# Altium PCB rpm.PcbDoc
Units mm, origin at the board's own origin, x right, y up, seen from the top; angles counter-clockwise.
Board outline 100 x 100 mm, 2 copper layers (Top Layer, Bottom Layer); 69 components, 54 nets, 281 pads, 0 vias.
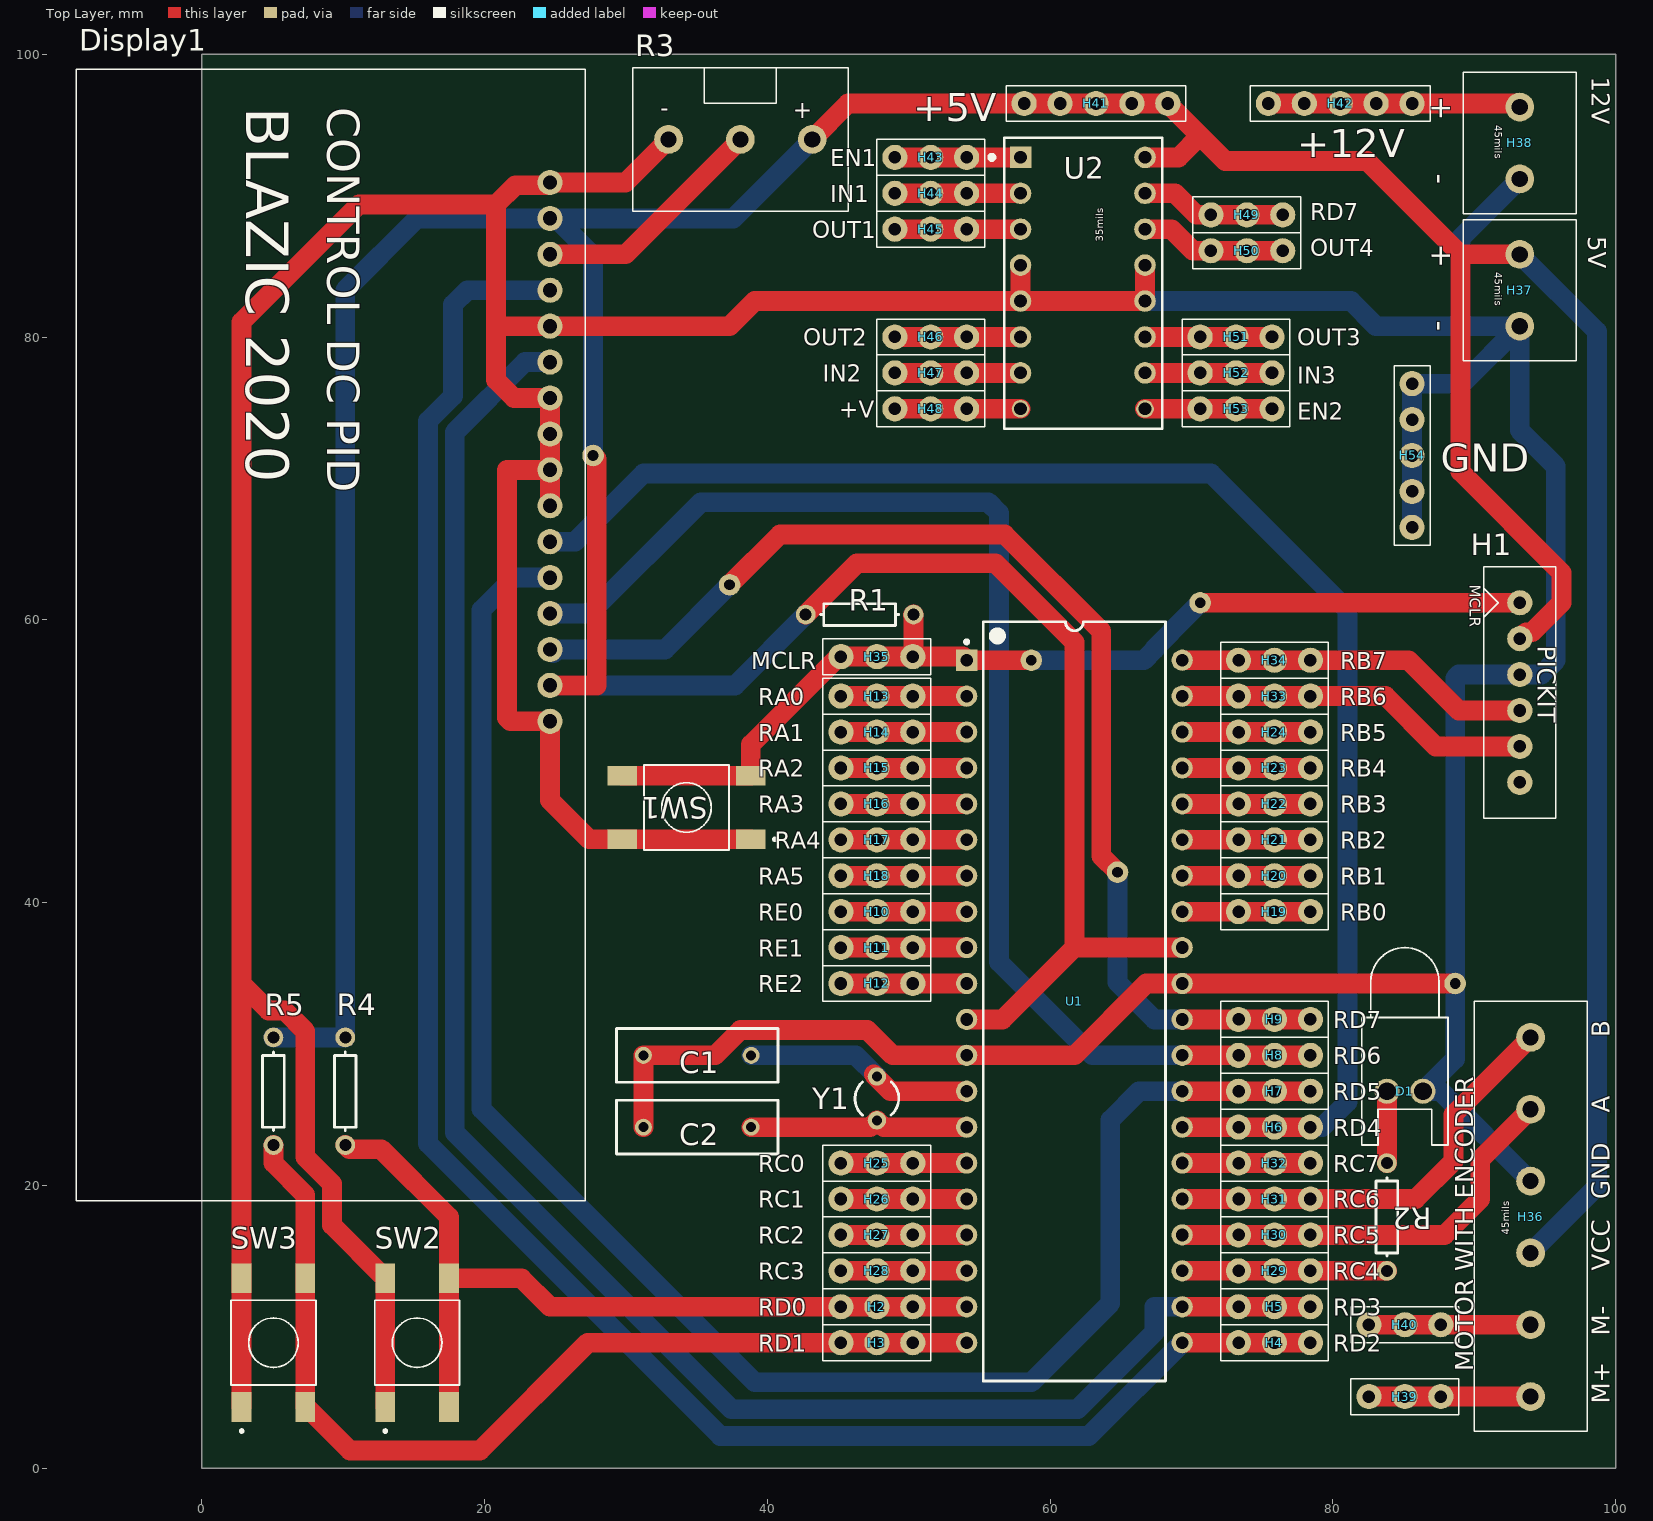
[diagram p0: Top Layer view]
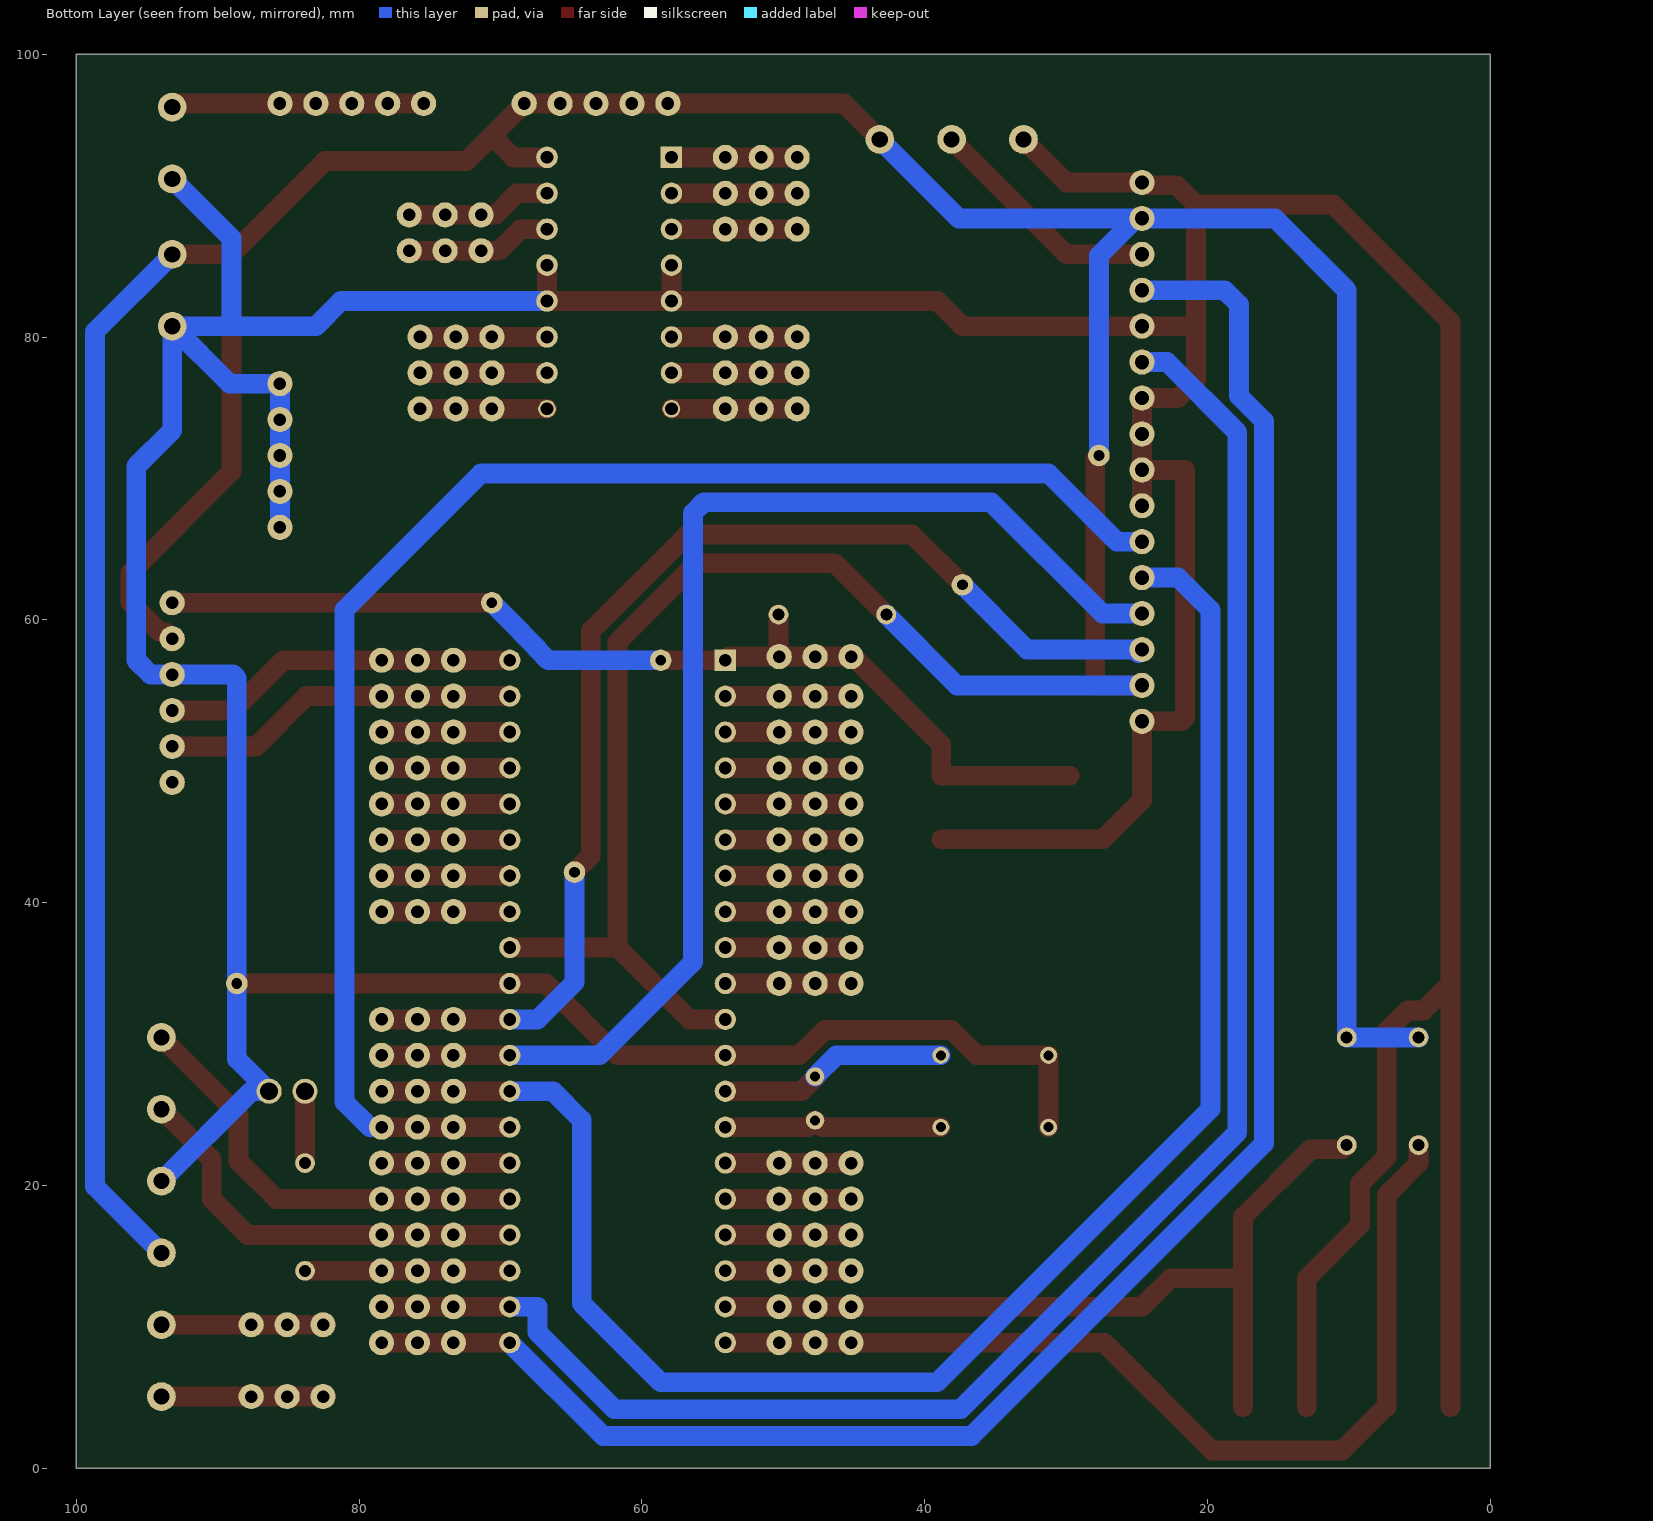
[diagram p1: Bottom Layer view, seen from below]

## Layer stack, top to bottom
Top Solder: solder mask 0.0102, Solder Resist, Dk 3.5
Top Layer: signal copper 0.0356
Dielectric 1: dielectric 0.32, FR-4, Dk 4.8
Bottom Layer: signal copper 0.0356
Bottom Solder: solder mask 0.0102, Solder Resist, Dk 3.5

## Board outline
0,0 100,0 100,100 0,100

## Design rules (kind name [scope] priority, off if disabled: settings)
Clearance [All] p1: gap=0.5 ignorepadtopadclearanceinfootprint=FALSE
PolygonConnect [All] p1: connectstyle=Relief reliefconductorwidth=0.254 reliefentries=4 polygonreliefangle="90 Angle" airgapwidth=0.254
RoutingVias [All] p1: holewidth=0.711 width=1.27 viastyle="Through Hole" minholewidth=0.711 minwidth=1.27 maxholewidth=0.711 maxwidth=1.27
SolderMaskExpansion [All] p1: expansion=0.102
Width [All] p1: maxlimit=1.6 minlimit=0.5 preferedwidth=1.4
30 further rules are at their usual default settings.

## Components (designator, comment, footprint, x,y, rotation, side; value= is the part's Value field where it differs from the comment)
C1 "Cap" RAD-0.3 35.052,29.21 r0 top value=22pF
C2 "Cap" RAD-0.3 35.052,24.13 r0 top value=22pF
D1 "LED0" LED-0 85.09,26.67 r180 top
Display1 "LCD 16 x 2" LCD16x2 27.138,98.932 r270 top
H1 "Programmer" Pickit 93.218,54.864 r270 top
H2 "Comment" "1X3 HEADER" 47.752,11.43 r180 top
H3 "Comment" "1X3 HEADER" 47.752,8.89 r180 top
H4 "Comment" "1X3 HEADER" 75.869,8.89 r180 top
H5 "Comment" "1X3 HEADER" 75.869,11.43 r180 top
H6 "Comment" "1X3 HEADER" 75.869,24.13 r180 top
H7 "Comment" "1X3 HEADER" 75.869,26.67 r180 top
H8 "Comment" "1X3 HEADER" 75.869,29.21 r180 top
H9 "Comment" "1X3 HEADER" 75.869,31.75 r180 top
H10 "Comment" "1X3 HEADER" 47.752,39.37 r180 top
H11 "Comment" "1X3 HEADER" 47.752,36.83 r180 top
H12 "Comment" "1X3 HEADER" 47.752,34.29 r180 top
H13 "Comment" "1X3 HEADER" 47.752,54.61 r180 top
H14 "Comment" "1X3 HEADER" 47.752,52.07 r180 top
H15 "Comment" "1X3 HEADER" 47.752,49.53 r180 top
H16 "Comment" "1X3 HEADER" 47.752,46.99 r180 top
H17 "Comment" "1X3 HEADER" 47.752,44.45 r180 top
H18 "Comment" "1X3 HEADER" 47.752,41.91 r180 top
H19 "Comment" "1X3 HEADER" 75.869,39.37 r180 top
H20 "Comment" "1X3 HEADER" 75.869,41.91 r180 top
H21 "Comment" "1X3 HEADER" 75.869,44.45 r180 top
H22 "Comment" "1X3 HEADER" 75.869,46.99 r180 top
H23 "Comment" "1X3 HEADER" 75.869,49.53 r180 top
H24 "Comment" "1X3 HEADER" 75.869,52.07 r180 top
H25 "Comment" "1X3 HEADER" 47.752,21.59 r180 top
H26 "Comment" "1X3 HEADER" 47.752,19.05 r180 top
H27 "Comment" "1X3 HEADER" 47.752,16.51 r180 top
H28 "Comment" "1X3 HEADER" 47.752,13.97 r180 top
H29 "Comment" "1X3 HEADER" 75.869,13.97 r180 top
H30 "Comment" "1X3 HEADER" 75.869,16.51 r180 top
H31 "Comment" "1X3 HEADER" 75.869,19.05 r180 top
H32 "Comment" "1X3 HEADER" 75.869,21.59 r180 top
H33 "Comment" "1X3 HEADER" 75.869,54.61 r180 top
H34 "Comment" "1X3 HEADER" 75.869,57.15 r180 top
H35 "Comment" "1X3 HEADER" 47.752,57.404 r0 top
H36 "Comment" "MOTOR ENCODER BLUE SCREW" 93.98,17.78 r90 top
H37 "5V" "1x2 Voltage blue screw" 93.218,83.312 r270 top
H38 "12V" "1x2 Voltage blue screw" 93.218,93.726 r270 top
H39 "Comment" "1X3 HEADER" 85.09,5.08 r180 top
H40 "Comment" "1X3 HEADER" 85.09,10.16 r180 top
H41 "Comment" "1X5 HEADER" 63.246,96.52 r180 top
H42 "Comment" "1X5 HEADER" 80.518,96.52 r180 top
H43 "Comment" "1X3 HEADER" 51.562,92.71 r0 top
H44 "Comment" "1X3 HEADER" 51.562,90.17 r180 top
H45 "Comment" "1X3 HEADER" 51.562,87.63 r180 top
H46 "Comment" "1X3 HEADER" 51.562,80.01 r180 top
H47 "Comment" "1X3 HEADER" 51.562,77.47 r180 top
H48 "Comment" "1X3 HEADER" 51.562,74.93 r180 top
H49 "Comment" "1X3 HEADER" 73.914,88.646 r180 top
H50 "Comment" "1X3 HEADER" 73.914,86.106 r180 top
H51 "Comment" "1X3 HEADER" 73.152,80.01 r180 top
H52 "Comment" "1X3 HEADER" 73.152,77.47 r180 top
H53 "Comment" "1X3 HEADER" 73.152,74.93 r180 top
H54 "Comment" "1X5 HEADER" 85.598,71.628 r90 top
R1 "Res1" AXIAL-0.3 46.53,60.378 r0 top value=10K
R2 "Res1" AXIAL-0.3 83.82,17.78 r90 top value=220
R3 "Potenciometar" ADJ_RES 38.1,93.98 r180 top
R4 "Res1" AXIAL-0.3 10.16,26.67 r270 top value=10K
R5 "Res1" AXIAL-0.3 5.08,26.67 r90 top value=10K
SW1 "Taster SMD" "Taster SMD" 34.29,46.736 r180 top
SW2 "Taster SMD" "Taster SMD" 15.24,8.89 r90 top
SW3 "Taster SMD" "Taster SMD" 5.08,8.89 r90 top
U1 "PIC16F877A-E/P" PDIP600-P40 61.722,33.02 r0 top
U2 "L293D" L293D 57.912,92.71 r0 top
Y1 "XTAL" R38 47.752,26.162 r0 top

## Footprints (in the part's own frame and the unit in brackets; to place one, negate y for a bottom-side part, rotate by r counter-clockwise, add the part's x,y. Pads: shape width x height; smd on the part's side, far side on the other; paste and mask are expansions set on the pad)
"1x2 Voltage blue screw" [mil] "Connector"
  round 80 hole 45: 1(-100,0) 2(100,0)
  silkscreen extent -197,-157 197,157, body extent -199,-178 201,176, height 599
"1X3 HEADER" [mil] "Distance 100mils"
  round 70 hole 35: 1(-100,0) 2(0,0) 3(100,0)
  silkscreen extent -150,-50 150,50
"1X5 HEADER" [mil] "Distance 100mils"
  round 70 hole 35: 1(-200,0) 2(-100,0) 3(0,0) 4(100,0) 5(200,0)
  silkscreen extent -250,-50 250,50
ADJ_RES [mil] "Promenljivi Otpornik"
  round 80 hole 45: 1(-200,0) 2(200,0) 3(0,0)
  silkscreen extent -300,-200 300,200
AXIAL-0.3 [mm] "Axial Device, Thru-Hole; 2 Leads; 0.3 in Pin Spacing"
  round 1.4 hole 0.85: 1(-3.81,0) 2(3.81,0)
  silkscreen extent -2.77,-0.76 2.77,0.76
L293D [mm]
  rect 1.524x1.524 hole 0.9: 1(0,0)
  round 1.524 hole 0.9: 2(0,-2.54) 3(0,-5.08) 4(0,-7.62) 5(0,-10.16) 6(0,-12.7) 7(0,-15.24) 10(8.8,-15.24) 11(8.8,-12.7) 12(8.8,-10.16) 13(8.8,-7.62) 14(8.8,-5.08) 15(8.8,-2.54) 16(8.8,0)
  round 1.25 hole 0.9: 8(0,-17.78) 9(8.8,-17.78)
  silkscreen extent -2.16,-19.18 10.03,1.4, body extent 0.25,-18.89 8.38,1.11, height 5.24
LCD16x2 [mil] "LCD16x2"
  round 70 hole 40: 1(314.96,-98.43) 2(414.96,-98.43) 3(514.96,-98.43) 4(614.96,-98.43) 5(714.96,-98.43) 6(814.96,-98.43) 7(914.96,-98.43) 8(1014.96,-98.43) 9(1114.96,-98.43) 10(1214.96,-98.43) 11(1314.96,-98.43) 12(1414.96,-98.43) 13(1514.96,-98.43) 14(1614.96,-98.43) 15(1714.96,-98.43) 16(1814.96,-98.43)
  silkscreen extent 0,-1417 3150,0
LED-0 [mil] "LED; 2 Leads"
  round 70 hole 50: 1(50,0) 2(-50,0)
  silkscreen extent -120,-400 120,150
"MOTOR ENCODER BLUE SCREW" [mil] "DC motor with encoder"
  round 80 hole 45: 1(-500,0) 2(-300,0) 3(-100,0) 4(100,0) 5(300,0) 6(500,0)
  silkscreen extent -597,-157 600,157
PDIP600-P40 [mm] "DIP, 40-Leads, Row Spacing 15.24mm, Pitch 2.54mm, Body 51.8x13.5mm"
  rect 1.5x1.5 hole 0.9: 1(-7.62,24.13)
  round 1.5 hole 0.9: 2(-7.62,21.59) 3(-7.62,19.05) 4(-7.62,16.51) 5(-7.62,13.97) 6(-7.62,11.43) 7(-7.62,8.89) 8(-7.62,6.35) 9(-7.62,3.81) 10(-7.62,1.27) 11(-7.62,-1.27) 12(-7.62,-3.81) 13(-7.62,-6.35) 14(-7.62,-8.89) 15(-7.62,-11.43) 16(-7.62,-13.97) 17(-7.62,-16.51) 18(-7.62,-19.05) 19(-7.62,-21.59) 20(-7.62,-24.13) 21(7.62,-24.13) 22(7.62,-21.59) 23(7.62,-19.05) 24(7.62,-16.51) 25(7.62,-13.97) 26(7.62,-11.43) 27(7.62,-8.89) 28(7.62,-6.35) 29(7.62,-3.81) 30(7.62,-1.27) 31(7.62,1.27) 32(7.62,3.81) 33(7.62,6.35) 34(7.62,8.89) 35(7.62,11.43) 36(7.62,13.97) 37(7.62,16.51) 38(7.62,19.05) 39(7.62,21.59) 40(7.62,24.13)
  silkscreen extent -7.74,-26.85 6.45,26.85, body extent -7.3,-26.85 7.3,26.85, height 6.35
Pickit [mil] "Programmer"
  round 70 hole 35: 1(-250,0) 2(-150,0) 3(-50,0) 4(50,0) 5(150,0) 6(250,0)
  silkscreen extent -350,-100 350,100
R38 [mm] "Crystal, Thru-Hole; 2 Leads; Body 3.1 x 8.2 mm (Dia.xH)"
  round 1.3 hole 0.7: 1(0,1.55) 2(0,-1.55)
  silkscreen extent -1.55,-1.19 1.55,1.17
RAD-0.3 [mm] "Radial Cap, Thru-Hole; 2 Leads; 0.3 in Pin Spacing"
  round 1.2 hole 0.7: 1(-3.81,0) 2(3.81,0)
  silkscreen extent -5.71,-1.91 5.71,1.91
"Taster SMD" [mm]
  rect 2.1x1.4 smd: 1(-4.55,2.25) 1(4.55,2.25) 2(-4.55,-2.25) 2(4.55,-2.25)
  silkscreen extent -6.35,-3 3,3, body extent -3.33,-2.67 3.07,2.63, height 1.5

## Part data
C1 C2: "Capacitor", LatestRevisionDate=17-Jul-2002, LatestRevisionNote="Re-released for DXP Platform.", PackageDescription="Radial Cap, Thru-Hole; 2 Leads; 0.3 in Pin Spacing", PackageReference=RAD-0.3, Published=8-Jun-2000, Publisher="Altium Limited"
D1: "Typical INFRARED GaAs LED", LatestRevisionDate=08-Jul-2005, LatestRevisionNote="Mech Layer 1 removed.", PackageDescription="LED; 2 Leads", PackageReference=LED-0, Published=8-Jun-2000, Publisher="Altium Limited"
Display1: library part "LCD 16 X 2"
H1: library part PICKIT
H2 H3 H4 H5 H6 H7 H8 H9 H10 H11 H12 H13 H14 H15 H16 H17 H18 H19 H20 H21 H22 H23 H24 H25 H26 H27 H28 H29 H30 H31 H32 H33 H34 H35 H39 H40 H43 H44 H45 H46 H47 H48 H49 H50 H51 H52 H53: library part "1X3 Header"
H36: library part "Motor encoder blue screw"
H37 H38: library part "1x2 Voltage blue screw"
H41 H42 H54: library part "1X5 Header"
R1 R2 R4 R5: "Resistor", LatestRevisionDate=17-Jul-2002, LatestRevisionNote="Re-released for DXP Platform.", PackageDescription="Axial Device, Thru-Hole; 2 Leads; 0.3 in Pin Spacing", PackageReference=AXIAL-0.3, Published=8-Jun-2000, Publisher="Altium Limited"
R3: library part ADJ_RES
SW1 SW2 SW3: Contact_Current_Rating="50 mA", Package=None, Availability=Unavailable, Configuration_Pole-Throw="Single Pole - Single Throw", MF="TE Connectivity", MP=2-1437565-8, Price=None, SnapEDA_Link=https://www.snapeda.com/parts/2-1437565-8/TE%20Connectivity%20ALCOSWITCH%20Switches/view-part/455292/?ref=snap, TE_purchase_URL=https://www.te.com/usa-en/product-2-1437565-8.html?te_bu=Cor&te_type=disp&te_campaign=seda_glo_cor-seda-global-disp-prtnr-fy19-seda-model-bom-cta_sma-317_1&elqCampaignId=32493
U1: "Enhanced FLASH Microcontroller, 8K (x14-Bit words) FLASH, 368 Bytes RAM, 40-Pin PDIP, Standard VDD Range, Extended Temperature", Supplier Part Number 1=PIC16F877A-E/P-ND, ComponentAvailability="Unknown. Contact manufacturer to determine status.", ComponentLink1Description=Datasheet, ComponentLink1URL=http://ww1.microchip.com/downloads/en/DeviceDoc/39582b.pdf, ComponentLink2Description="Packaging Specification", ComponentLink2URL=http://www.microchip.com/stellent/groups/techpub_sg/documents/packagingspec/en012702.pdf, ComponentLink3Description="Microchip.com Home", ComponentLink3URL=http://www.microchip.com/, DatasheetVersion="revB, Oct-2003", LatestRevisionDate=29-Jan-2009, LatestRevisionNote="Sch. layout revised. 3D Model Removed.", PackageDescription="40-Lead Plastic Dual In-Line (P) - 600 mil Body [PDIP]", PackageReference=PDIP600-P40, PackageVersion="revBB, Aug-2009", Published=11-Oct-2004, Publisher="Altium Limited", Supplier 1=Digi-Key, Supplier 2=Farnell, Supplier Part Number 2=1567990
U2: "Motor Driver"
Y1: "Crystal Oscillator", LatestRevisionDate=17-Jul-2002, LatestRevisionNote="Re-released for DXP Platform.", PackageDescription="Crystal, Thru-Hole; 2 Leads; Body 3.1 x 8.2 mm (Dia.xH)", PackageReference=R38, Published=8-Jun-2000, Publisher="Altium Limited"

## Free pads (board coordinates)
  round 1.524 hole 0.762: 3(37.338,62.484) 4(64.77,42.164) 5(58.674,57.15) 6(70.612,61.214) 7(88.646,34.29) 9(27.686,71.628)

## Nets (pads, with @x,y where several pads share a name; then routed paths per layer and width w, separated by ;. In a path a pad name is that pad's centre, name@x,y a point inside that pad or via, vN(x,y) a via of type N, cw(c..) or ccw(c..) an arc to the next point about the centre after c; other vN are vias at no path point)
5V: Display1.2 Display1.15 H1.2 H36.3 H37.1 H41.1 H41.2 H41.3 H41.4 H41.5 pad.9 R1.1 R3.1 R4.1 R5.2 U1.11 U1.32 U2.16 | length 381.2
  Top Layer w1.4: Display1.15 27.94,55.372 27.94,71.374 pad.9 ; R1.1 46.35,64.008 56.134,64.008 61.722,58.42 61.722,36.83 ; R3.1 45.72,96.52 H41.5 H41.4 H41.3 H41.2 H41.1 70.612,94.234 ; U1.11 56.642,31.75 61.722,36.83 ; U2.16 69.088,92.71 70.612,94.234 ; U1.32 61.722,36.83 ; H1.2 93.669,59.125 94.083,59.125 96.172,61.214 96.172,63.34 89.027,70.485 89.027,85.852 ; H37.1 89.027,85.852 ; 70.612,94.234 72.39,92.456 82.423,92.456 89.027,85.852
  Bottom Layer w1.4: R5.2 R4.1 10.16,83.312 15.24,88.392 Display1.2 Display1.2@25.052,88.392 ; Display1.15 37.714,55.372 R1.1 ; pad.9 27.686,85.758 Display1.2@25.052,88.392 ; R3.1 37.592,88.392 Display1.2@25.052,88.392 ; H37.1 98.679,80.391 98.679,59.182 98.679,19.939 H36.3
12V: H38.1 H42.1 H42.2 H42.3 H42.4 H42.5 | length 17.9
  Top Layer w1.4: H42.5 H42.4 H42.3 H42.2 H42.1 92.964,96.52 H38.1
+V: H48.1 H48.2 H48.3 U2.8 | length 8.9
  Top Layer w1.4: H48.3 H48.2 H48.1 U2.8
EN1: H43.1 H43.2 H43.3 U2.1 | length 8.9
  Top Layer w1.4: H43.1 H43.2 H43.3 U2.1
EN2: H53.1 H53.2 H53.3 U2.9 | length 9
  Top Layer w1.4: U2.9 H53.3 H53.2 H53.1
GND: C1.1 C2.1 D1.2 Display1.1 Display1.5 Display1.7 Display1.8 Display1.9 Display1.10 Display1.16 H1.3 H36.4 H37.2 H38.2 H54.1 H54.2 H54.3 H54.4 H54.5 pad.7 R3.2 SW1.1 SW2.1 SW3.1 U1.12 U1.31 U2.4 U2.5 U2.12 U2.13 | length 465.5
  Top Layer w1.4: SW3.1@2.83,4.34 2.83,13.44 2.83,34.29 ; SW2.1@12.99,4.34 12.99,13.44 9.23,17.2 9.23,20.127 7.33,22.027 7.33,30.917 5.867,32.38 4.74,32.38 2.83,34.29 ; Display1.10 Display1.9 ; C2.1 C1.1 36.316,29.21 38.116,31.01 47.07,31.01 48.87,29.21 U1.12 61.722,29.21 66.802,34.29 U1.31 pad.7 ; R3.2 29.972,90.932 Display1.1 24.449,90.743 22.202,90.743 20.828,89.369 ; SW1.1@38.84,44.486 29.74,44.486 27.396,44.486 24.638,47.244 Display1.16 21.844,52.832 21.59,53.086 21.59,70.612 Display1.9 ; U2.4 U2.5 ; U2.13 U2.12 U2.5 ; 2.83,34.29 2.83,81.062 11.137,89.369 20.828,89.369 ; 20.828,80.772 20.828,89.369 ; 20.828,80.772 20.828,76.962 22.098,75.692 Display1.7 Display1.8 Display1.9 ; 20.828,80.772 Display1.5 37.338,80.772 39.116,82.55 U2.5
  Bottom Layer w1.4: U2.12 81.28,82.55 83.058,80.772 89.027,80.772 ; H54.1 H54.2 H54.3 H54.4 H54.5 89.154,76.708 H37.2 ; H38.2 89.027,86.995 89.027,80.772 ; H36.4 87.63,26.67 D1.2 88.646,28.956 pad.7 88.646,55.88 88.9,56.134 H1.3 94.742,56.134 95.758,57.15 95.758,70.866 93.218,73.406 H37.2 ; 89.027,80.772 H37.2
IN1: H44.1 H44.2 H44.3 U2.2 | length 8.9
  Top Layer w1.4: H44.3 H44.2 H44.1 U2.2
IN2: H47.1 H47.2 H47.3 U2.7 | length 8.9
  Top Layer w1.4: H47.3 H47.2 H47.1 U2.7
IN3: H52.1 H52.2 H52.3 U2.10 | length 9
  Top Layer w1.4: U2.10 H52.3 H52.2 H52.1
IN4: H49.1 H49.2 H49.3 U2.15 | length 10.4
  Top Layer w1.4: U2.15 68.834,90.17 70.358,88.646 H49.3 H49.2 H49.1
M+: H36.1 H39.1 H39.2 H39.3 | length 11.4
  Top Layer w1.4: H39.3 H39.2 H39.1 H36.1
M-: H36.2 H40.1 H40.2 H40.3 | length 11.4
  Top Layer w1.4: H40.3 H40.2 H40.1 H36.2
MCLR: H1.1 H35.1 H35.2 H35.3 pad.5 pad.6 R1.2 SW1.2 U1.1 | length 73.2
  Top Layer w1.4: SW1.2@29.74,48.986 38.84,48.986 38.84,51.192 45.052,57.404 H35.1 H35.2 H35.3 ; R1.2@50.292,60.33 R1.2 50.34,57.452 H35.3 ; pad.5 U1.1 53.848,57.404 H35.3 ; pad.6 H1.1
  Bottom Layer w1.4: H35.3 H35.3@50.34,57.452 ; pad.5 66.63,57.15 67.392,57.912 67.392,57.958 68.534,59.1 68.534,59.136 pad.6
NetD1_1: D1.1 R2.2 | length 5.1
  Top Layer w1.4: R2.2 D1.1
NetDisplay1_3: Display1.3 R3.3 | length 16.8
  Top Layer w1.4: Display1.3 29.972,85.852 R3.3
OSC1: C1.2 U1.13 Y1.1 | length 16.6
  Top Layer w1.4: Y1.1@47.527,27.866 48.723,26.67 U1.13
  Bottom Layer w1.4: C1.2 46.254,29.21 Y1.1
OSC2: C2.2 U1.14 Y1.2 | length 15.6
  Top Layer w1.4: C2.2 47.27,24.13 Y1.2 48.234,24.13 U1.14
OUT1: H45.1 H45.2 H45.3 U2.3 | length 8.9
  Top Layer w1.4: H45.3 H45.2 H45.1 U2.3
OUT2: H46.1 H46.2 H46.3 U2.6 | length 8.9
  Top Layer w1.4: H46.3 H46.2 H46.1 U2.6
OUT3: H51.1 H51.2 H51.3 U2.11 | length 9
  Top Layer w1.4: U2.11 H51.3 H51.2 H51.1
OUT4: H50.1 H50.2 H50.3 U2.14 | length 10.4
  Top Layer w1.4: U2.14 68.58,87.63 70.104,86.106 H50.3 H50.2 H50.1
PGC: H1.5 H33.1 H33.2 H33.3 U1.39 | length 25.3
  Top Layer w1.4: U1.39 H33.3 H33.2 H33.1 83.713,54.61 87.269,51.054 H1.5
PGD: H1.4 H34.1 H34.2 H34.3 U1.40 | length 25.3
  Top Layer w1.4: U1.40 H34.3 H34.2 H34.1 85.344,57.15 88.9,53.594 H1.4
RA0: H13.1 H13.2 H13.3 U1.2 | length 8.9
  Top Layer w1.4: H13.3 H13.2 H13.1 U1.2
RA1: H14.1 H14.2 H14.3 U1.3 | length 8.9
  Top Layer w1.4: H14.3 H14.2 H14.1 U1.3
RA2: H15.1 H15.2 H15.3 U1.4 | length 8.9
  Top Layer w1.4: H15.3 H15.2 H15.1 U1.4
RA3: H16.1 H16.2 H16.3 U1.5 | length 8.9
  Top Layer w1.4: H16.3 H16.2 H16.1 U1.5
RA4: H17.1 H17.2 H17.3 U1.6 | length 8.9
  Top Layer w1.4: H17.3 H17.2 H17.1 U1.6
RA5: H18.1 H18.2 H18.3 U1.7 | length 8.9
  Top Layer w1.4: H18.3 H18.2 H18.1 U1.7
RB0: H19.1 H19.2 H19.3 U1.33 | length 9.1
  Top Layer w1.4: U1.33 H19.3 H19.2 H19.1
RB1: H20.1 H20.2 H20.3 U1.34 | length 9.1
  Top Layer w1.4: U1.34 H20.3 H20.2 H20.1
RB2: H21.1 H21.2 H21.3 U1.35 | length 9.1
  Top Layer w1.4: U1.35 H21.3 H21.2 H21.1
RB3: H22.1 H22.2 H22.3 U1.36 | length 9.1
  Top Layer w1.4: U1.36 H22.3 H22.2 H22.1
RB4: H23.1 H23.2 H23.3 U1.37 | length 8.5
  Top Layer w1.4: U1.37@69.932,49.53 H23.3 H23.2 H23.1
RB5: H24.1 H24.2 H24.3 U1.38 | length 9.1
  Top Layer w1.4: U1.38 H24.3 H24.2 H24.1
RC0: H25.1 H25.2 H25.3 U1.15 | length 8.9
  Top Layer w1.4: H25.3 H25.2 H25.1 U1.15
RC1: H26.1 H26.2 H26.3 U1.16 | length 8.9
  Top Layer w1.4: H26.3 H26.2 H26.1 U1.16
RC2: H27.1 H27.2 H27.3 U1.17 | length 8.9
  Top Layer w1.4: H27.3 H27.2 H27.1 U1.17
RC3: H28.1 H28.2 H28.3 U1.18 | length 8.9
  Top Layer w1.4: H28.3 H28.2 H28.1 U1.18
RC4: H29.1 H29.2 H29.3 R2.1 U1.23 | length 14.5
  Top Layer w1.4: U1.23 H29.3 H29.2 H29.1 R2.1
RC5: H30.1 H30.2 H30.3 H36.5 U1.24 | length 30
  Top Layer w1.4: U1.24 H30.3 H30.2 H30.1 87.884,16.51 90.424,19.05 90.424,21.844 H36.5
RC6: H31.1 H31.2 H31.3 H36.6 U1.25 | length 31.3
  Top Layer w1.4: U1.25 H31.3 H31.2 H31.1 85.852,19.05 88.524,21.722 88.524,25.024 H36.6
RC7: H32.1 H32.2 H32.3 U1.26 | length 9.1
  Top Layer w1.4: U1.26 H32.3 H32.2 H32.1
RD0: H2.1 H2.2 H2.3 R4.2 SW2.2 U1.19 | length 60.3
  Top Layer w1.4: R4.2 10.45,22.57 12.7,22.57 17.49,17.78 SW2.2@17.49,13.44 ; SW2.2@17.49,4.34 SW2.2@17.49,13.44 ; U1.19 H2.1 H2.2 H2.3 24.638,11.43 22.628,13.44 SW2.2@17.49,13.44
RD1: H3.1 H3.2 H3.3 R5.1 SW3.2 U1.20 | length 70.7
  Top Layer w1.4: R5.1 5.08,21.59 7.33,19.34 7.33,13.44 7.33,4.34 7.43,4.34 10.5,1.27 19.685,1.27 27.305,8.89 H3.3 H3.2 H3.1 U1.20
RD2: Display1.4 H4.1 H4.2 H4.3 U1.21 | length 141.2
  Top Layer w1.4: U1.21 H4.3 H4.2 H4.1
  Bottom Layer w1.4: Display1.4 18.796,83.312 17.78,82.296 17.78,75.839 16.002,74.061 16.002,22.967 36.683,2.286 37.338,2.286 ; 37.47,2.286 37.338,2.286 ; U1.21 62.738,2.286 37.338,2.286
RD3: Display1.6 H5.1 H5.2 H5.3 U1.22 | length 131
  Top Layer w1.4: U1.22 H5.3 H5.2 H5.1
  Bottom Layer w1.4: Display1.6 22.86,78.232 17.902,73.274 17.902,23.754 37.47,4.186 61.951,4.186 67.392,9.627 67.392,11.43 U1.22
RD4: Display1.11 H6.1 H6.2 H6.3 U1.27 | length 109.6
  Top Layer w1.4: U1.27 H6.3 H6.2 H6.1
  Bottom Layer w1.4: Display1.11 26.416,65.532 31.242,70.358 71.374,70.358 81.026,60.706 81.026,25.908 79.248,24.13 H6.1
RD5: Display1.12 H7.1 H7.2 H7.3 U1.28 | length 123.8
  Top Layer w1.4: U1.28 H7.3 H7.2 H7.1
  Bottom Layer w1.4: Display1.12 22.098,62.992 19.802,60.696 19.802,25.41 39.126,6.086 58.664,6.086 64.262,11.684 64.262,24.638 66.294,26.67 U1.28
RD6: Display1.13 H8.1 H8.2 H8.3 U1.29 | length 91.8
  Top Layer w1.4: U1.29 H8.3 H8.2 H8.1
  Bottom Layer w1.4: Display1.13 27.432,60.452 35.306,68.326 55.626,68.326 56.388,67.564 56.388,35.814 62.992,29.21 U1.29
RD7: Display1.14 H9.1 H9.2 H9.3 pad.3 pad.4 U1.30 | length 85.6
  Top Layer w1.4: pad.3 40.894,66.04 56.789,66.04 63.622,59.207 63.622,43.312 pad.4 ; U1.30 H9.3 H9.2 H9.1
  Bottom Layer w1.4: Display1.14@24.892,57.658 Display1.14 32.766,57.912 pad.3 ; pad.4 64.77,34.372 67.392,31.75 U1.30
RE0: H10.1 H10.2 H10.3 U1.8 | length 8.9
  Top Layer w1.4: H10.3 H10.2 H10.1 U1.8
RE1: H11.1 H11.2 H11.3 U1.9 | length 8.9
  Top Layer w1.4: H11.3 H11.2 H11.1 U1.9
RE2: H12.1 H12.2 H12.3 U1.10 | length 8.9
  Top Layer w1.4: H12.3 H12.2 H12.1 U1.10
pads on no net: H1.6

## Silkscreen, mask and mechanical layers (free items; w line width, h text height)
Top Overlay:
  text "BLAZIC 2020" at 3.175,96.266 h3 r270
  text "CONTROL DC PID" at 8.89,96.266 h2.3 r270
  text "+5V" at 50.34,95.25 h2
  text "+12V" at 77.47,92.71 h2
  text "EN1" at 44.45,92.075 h1.2
  text "IN1" at 44.45,89.535 h1.2
  text "RD7" at 78.409,88.265 h1.2
  text "OUT1" at 43.18,86.995 h1.2
  text "OUT4" at 78.409,85.725 h1.2
  text "OUT2" at 42.545,79.375 h1.2
  text "OUT3" at 77.47,79.375 h1.2
  text "IN2" at 43.942,76.835 h1.2
  text "IN3" at 77.47,76.708 h1.2
  text "+V" at 45.085,74.295 h1.2
  text "EN2" at 77.47,74.168 h1.2
  text "GND" at 87.63,70.485 h2
  text "MCLR" at 38.862,56.515 h1.2
  text "RB7" at 80.518,56.515 h1.2
  text "RA0" at 39.37,53.975 h1.2
  text "RB6" at 80.518,53.975 h1.2
  text "RA1" at 39.37,51.435 h1.2
  text "RB5" at 80.518,51.435 h1.2
  text "RA2" at 39.37,48.895 h1.2
  text "RB4" at 80.518,48.895 h1.2
  text "RA3" at 39.37,46.355 h1.2
  text "RB3" at 80.518,46.355 h1.2
  text "RA4" at 40.54,43.815 h1.2
  text "RB2" at 80.518,43.815 h1.2
  text "RA5" at 39.37,41.275 h1.2
  text "RB1" at 80.518,41.275 h1.2
  text "RE0" at 39.37,38.735 h1.2
  text "RB0" at 80.518,38.735 h1.2
  text "RE1" at 39.37,36.195 h1.2
  text "RE2" at 39.37,33.655 h1.2
  text "RD7" at 80.01,31.115 h1.2
  text "RD6" at 80.01,28.575 h1.2
  text "RD5" at 80.01,26.035 h1.2
  text "RD4" at 80.01,23.495 h1.2
  text "RC0" at 39.37,20.955 h1.2
  text "RC7" at 80.01,20.955 h1.2
  text "RC1" at 39.37,18.415 h1.2
  text "RC6" at 80.01,18.415 h1.2
  text "RC2" at 39.37,15.875 h1.2
  text "RC5" at 80.01,15.875 h1.2
  text "RC3" at 39.37,13.335 h1.2
  text "RC4" at 80.01,13.335 h1.2
  text "RD0" at 39.37,10.795 h1.2
  text "RD3" at 80.01,10.795 h1.2
  text "RD1" at 39.37,8.255 h1.2
  text "RD2" at 80.01,8.255 h1.2

## Text inside footprints (layer, text, board x,y; h text height)
H1: Top Overlay "MCLR" at 89.662,62.484 h0.76 r270; Top Overlay "PICKIT" at 94.488,58.166 h1.27 r270
H36: Top Overlay "GND" at 99.568,19.05 h1.27 r90; Top Overlay "B" at 99.568,30.48 h1.27 r90; Top Overlay "A" at 99.568,25.146 h1.27 r90; Top Overlay "VCC" at 99.568,13.97 h1.27 r90; Top Overlay "M-" at 99.568,9.398 h1.27 r90; Top Overlay "M+" at 99.568,4.572 h1.27 r90; Top Overlay "MOTOR WITH ENCODER" at 89.916,6.858 h1.27 r90; Top Overlay "45mils" at 92.456,16.51 h0.51 r90
H37: Top Overlay "-" at 86.868,81.153 h1.5 r270; Top Overlay "+" at 86.995,86.614 h1.5 r270; Top Overlay "45mils" at 91.44,84.582 h0.51 r270
H38: Top Overlay "-" at 86.868,91.567 h1.5 r270; Top Overlay "+" at 86.995,97.028 h1.5 r270; Top Overlay "45mils" at 91.44,94.996 h0.51 r270
R3: Top Overlay "+" at 43.18,96.52 h1.2 r180; Top Overlay "-" at 33.02,96.52 h1.2 r180
U2: Top Overlay "35mils" at 63.754,86.741 h0.51 r90